# Altium PCB AfternoonCape_RevA3_6chan.PcbDoc
Units mil, origin at the board's own origin, x right, y up, seen from the top; angles counter-clockwise.
Board outline 3400 x 2150.01 mil, 2 copper layers (Top Layer, Bottom Layer); 80 components, 65 nets, 431 pads, 47 vias.
Unrouted connection lines stored in the file: 2.
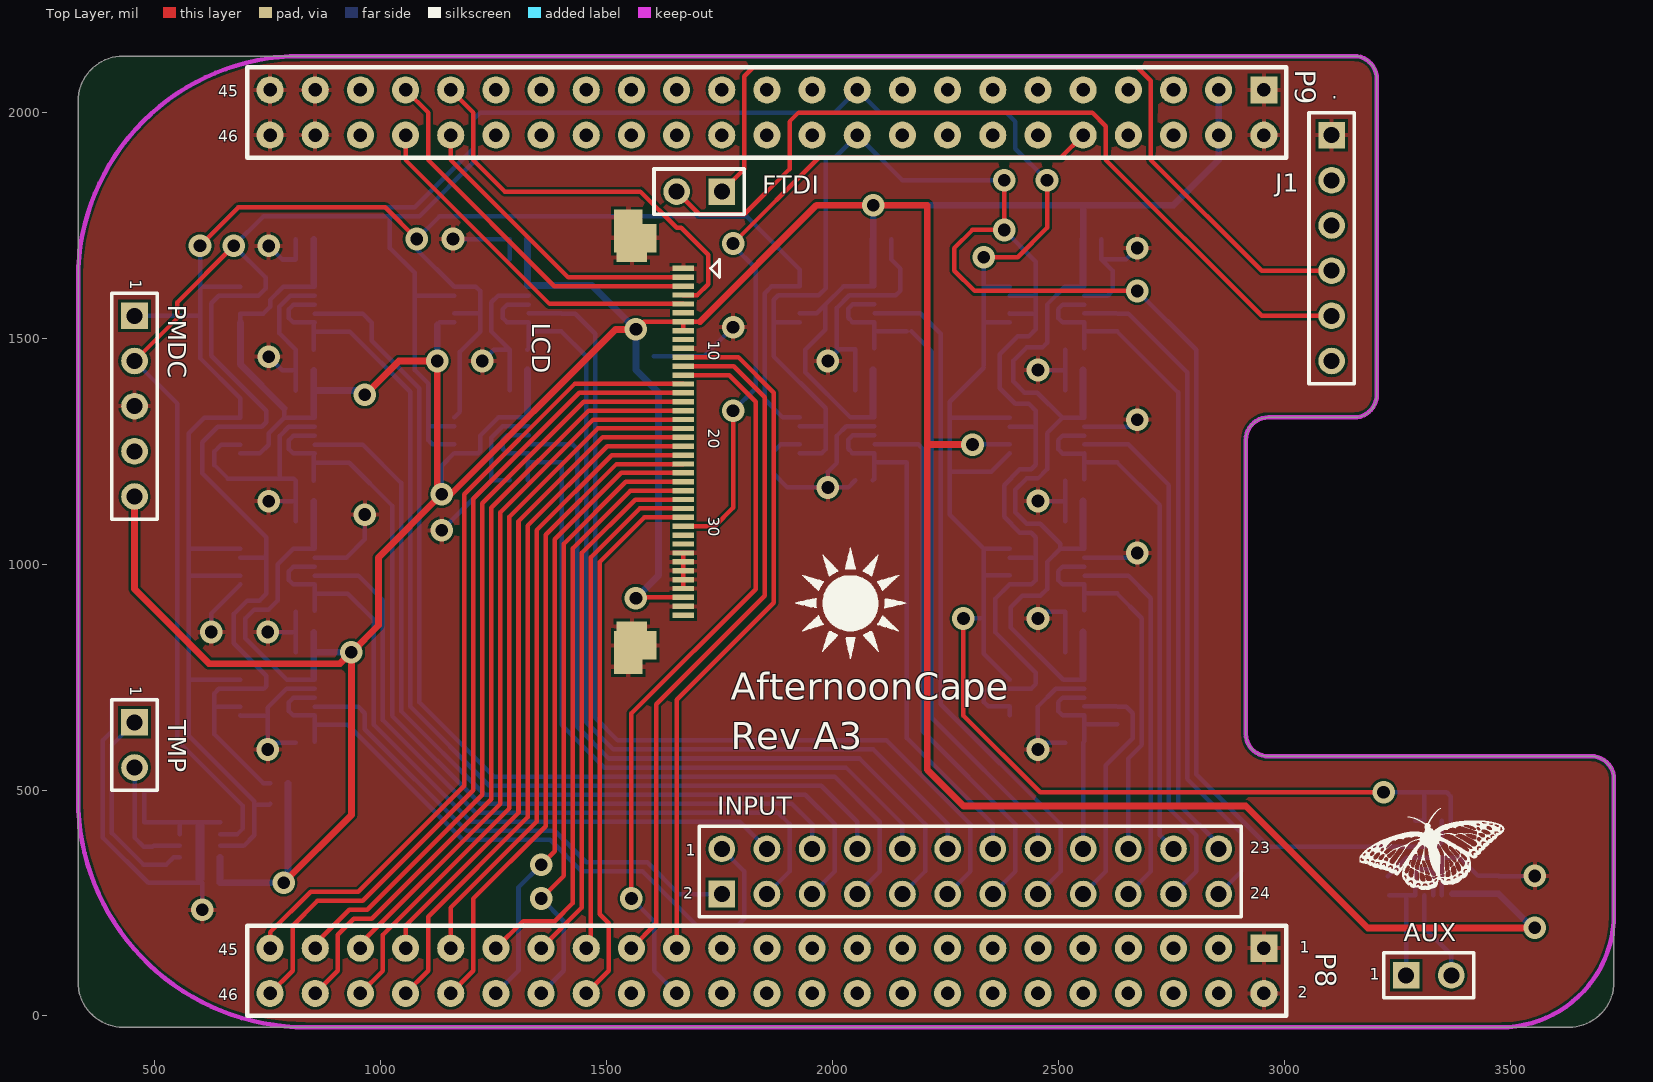
[diagram p0: Top Layer view]
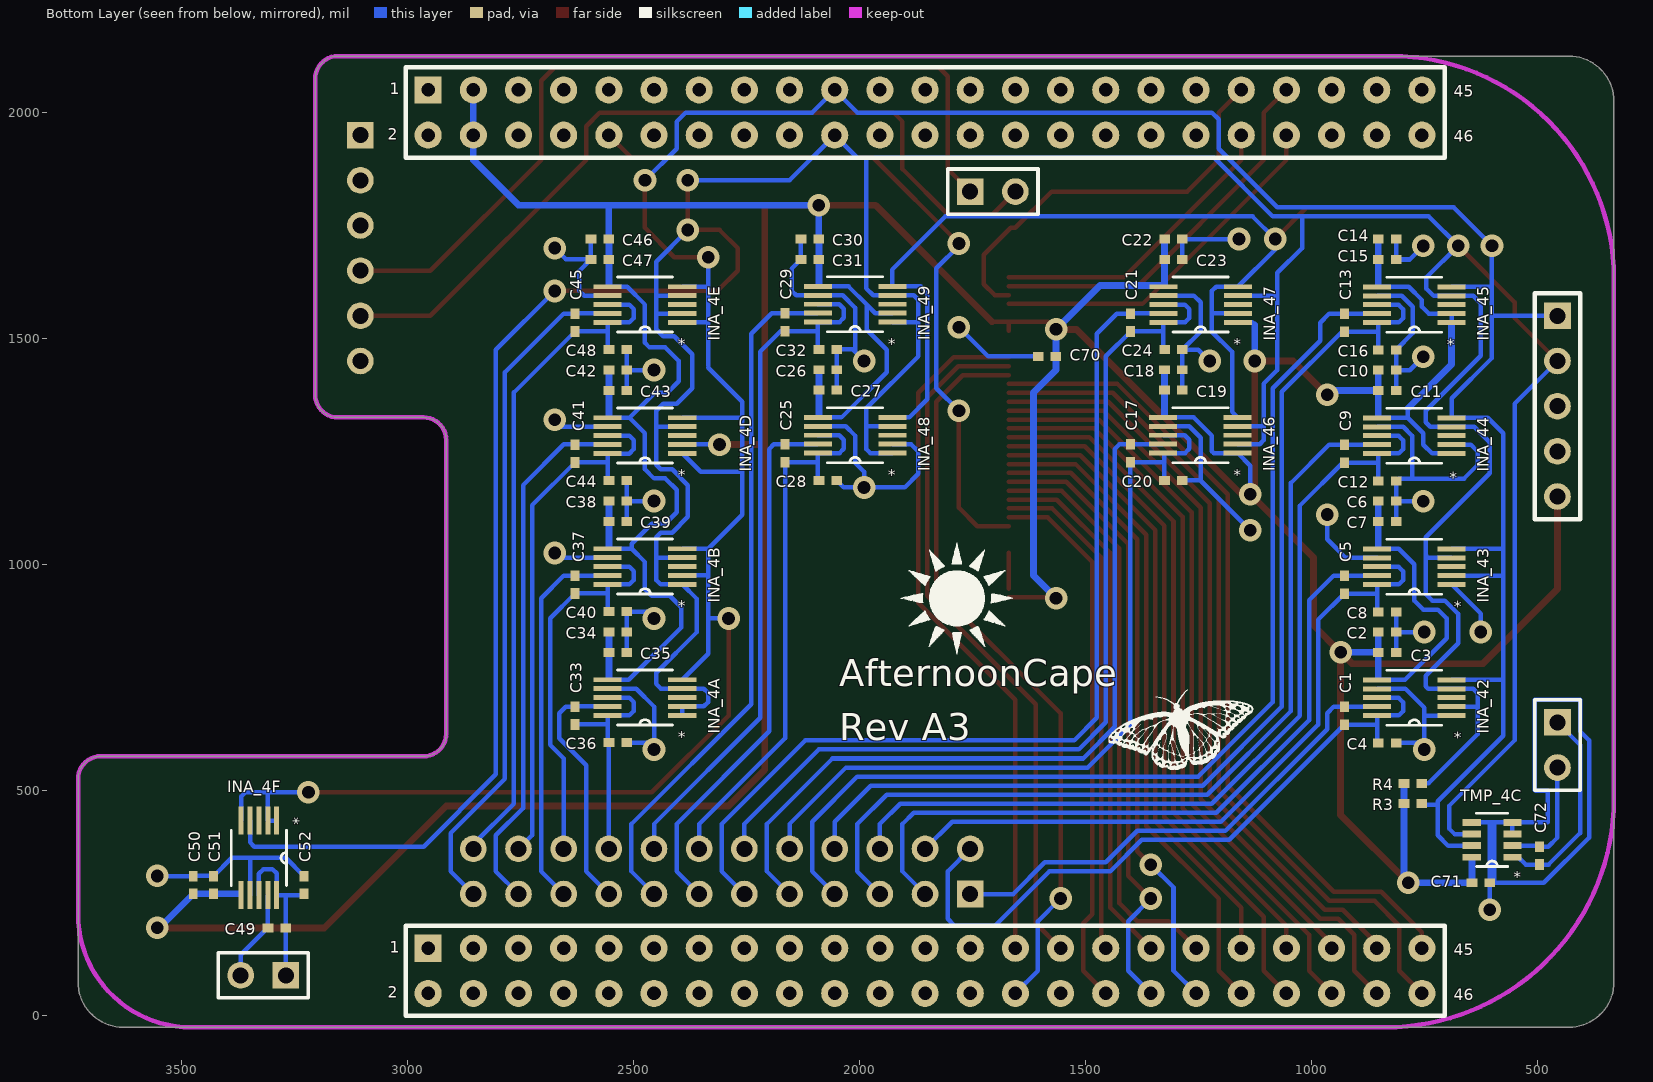
[diagram p1: Bottom Layer view, seen from below]

## Layer stack, top to bottom
Top Layer: signal copper 1.4
Dielectric: dielectric 12.6, FR-4, Dk 4.8
Bottom Layer: signal copper 1.4

## Board outline
3155,2125 3154.99,2125.01 822.5,2125.01 430,2125.01 ccw(c430,2025.01) 330,2025.01 330,480 330,75 ccw(c430,75) 430,-25 845,-25 3450,-25 3630,-25 ccw(c3630,75) 3730,75 3730,285 3730,525 ccw(c3680,525) 3680,575 2980,575 2965,575 cw(c2965,625) 2915,625 2915,1275 cw(c2965,1275) 2965,1325 2980,1325 3155,1325 ccw(c3155,1375) 3205,1375 3205,2075 ccw(c3155,2075) 3155,2125 3150,2125

## Design rules (kind name [scope] priority, off if disabled: settings)
Clearance [All] p1: gap=6
MinimumSolderMaskSliver [All] p1: minsoldermaskwidth=0
PolygonConnect [All] p1: connectstyle=Relief reliefconductorwidth=10 reliefentries=4 polygonreliefangle="90 Angle"
RoomDefinition AfternoonCape_RevA3_6chan [InComponentClass('AfternoonCape_RevA3_6chan')] p1: confinementstyle=ConfineIn formatcopy=TRUE lockcomponents=FALSE outline -715,-495 13870,-495 13870,2530 -715,2530
RoutingVias [All] p1: holewidth=28 width=50 viastyle="Through Hole" minholewidth=28 minwidth=50 maxholewidth=28 maxwidth=50
SilkToSilkClearance [All] p1: silktosilkclearance=5
SilkscreenOverComponentPads [All] p1: minsilkscreentomaskgap=10
SolderMaskExpansion [All] p1: expansion=4
Width [All] p1: maxlimit=20 minlimit=10 preferedwidth=10
25 further rules are at their usual default settings.

## Classes and differential pairs
component class AfternoonCape_RevA3_6chan: AUX C1 C2 C3 C4 C5 C6 C7 C8 C9 C10 C11 C12 C13 C14 C15 C16 C17 C18 C19 C20 C21 C22 C23 C24 C25 C26 C27 C28 C29 C30 C31 C32 C33 C34 C35 C36 C37 C38 C39 C40 C41 C42 C43 C44 C45 C46 C47 C48 C52 C70 C71 C72 FTDI INA_4A INA_4B INA_4D INA_4E INA_4F INA_42 INA_43 INA_44 INA_45 INA_46 INA_47 INA_48 INA_49 INPUT J1 LCD P8 P9 PMDC TMP TMP_4C

## Components (designator, comment, footprint, x,y, rotation, side; value= is the part's Value field where it differs from the comment)
AUX "Header 2" HDR1X2 3270,90 r0 top
C1 "Cap Semi" 0402 926.87,664.68 r270 bottom
C2 "Cap Semi" 0402 831.87,849.68 r0 bottom
C3 "Cap Semi" 0402 831.87,804.68 r0 bottom
C4 "Cap Semi" 0402 831.87,604.68 r0 bottom
C5 "Cap Semi" 0402 926.87,954.68 r270 bottom
C6 "Cap Semi" 0402 831.87,1139.68 r0 bottom
C7 "Cap Semi" 0402 831.87,1094.68 r0 bottom
C8 "Cap Semi" 0402 831.87,894.68 r0 bottom
C9 "Cap Semi" 0402 926.87,1244.68 r270 bottom
C10 "Cap Semi" 0402 831.87,1429.68 r0 bottom
C11 "Cap Semi" 0402 831.87,1384.68 r0 bottom
C12 "Cap Semi" 0402 831.87,1184.68 r0 bottom
C13 "Cap Semi" 0402 926.87,1534.68 r270 bottom
C14 "Cap Semi" 0402 831.87,1719.68 r0 bottom
C15 "Cap Semi" 0402 831.87,1674.68 r0 bottom
C16 "Cap Semi" 0402 831.87,1474.68 r0 bottom
C17 "Cap Semi" 0402 1400.31,1245.63 r270 bottom
C18 "Cap Semi" 0402 1305.31,1430.63 r0 bottom
C19 "Cap Semi" 0402 1305.31,1385.63 r0 bottom
C20 "Cap Semi" 0402 1305.31,1185.63 r0 bottom
C21 "Cap Semi" 0402 1400,1535 r270 bottom
C22 "Cap Semi" 0402 1305,1720 r0 bottom
C23 "Cap Semi" 0402 1305,1675 r0 bottom
C24 "Cap Semi" 0402 1305,1475 r0 bottom
C25 "Cap Semi" 0402 2165,1245.63 r270 bottom
C26 "Cap Semi" 0402 2070,1430.63 r0 bottom
C27 "Cap Semi" 0402 2070,1385.63 r0 bottom
C28 "Cap Semi" 0402 2070,1185.63 r0 bottom
C29 "Cap Semi" 0402 2165,1535.63 r270 bottom
C30 "Cap Semi" 0402 2110,1720 r180 bottom
C31 "Cap Semi" 0402 2110,1675 r180 bottom
C32 "Cap Semi" 0402 2070,1475.63 r0 bottom
C33 "Cap Semi" 0402 2630,665 r270 bottom
C34 "Cap Semi" 0402 2535,850 r0 bottom
C35 "Cap Semi" 0402 2535,805 r0 bottom
C36 "Cap Semi" 0402 2535,605 r0 bottom
C37 "Cap Semi" 0402 2630,955 r270 bottom
C38 "Cap Semi" 0402 2535,1140 r0 bottom
C39 "Cap Semi" 0402 2535,1095 r0 bottom
C40 "Cap Semi" 0402 2535,895 r0 bottom
C41 "Cap Semi" 0402 2630,1245 r270 bottom
C42 "Cap Semi" 0402 2535,1430 r0 bottom
C43 "Cap Semi" 0402 2535,1385 r0 bottom
C44 "Cap Semi" 0402 2535,1185 r0 bottom
C45 "Cap Semi" 0402 2630,1535 r270 bottom
C46 "Cap Semi" 0402 2575,1720 r180 bottom
C47 "Cap Semi" 0402 2575,1675 r180 bottom
C48 "Cap Semi" 0402 2535,1475 r0 bottom
C49 "Cap Semi" 0402 3290,195 r180 bottom
C50 "Cap Semi" 0402 3475,290 r270 bottom
C51 "Cap Semi" 0402 3430,290 r270 bottom
C52 "Cap Semi" 0402 3229.69,290 r270 bottom
C70 "Cap Semi" 0402 1585,1460 r180 bottom
C71 "Cap Semi" 0402 624.68,295 r0 bottom
C72 "Cap Semi" 0402 494.68,355 r270 bottom
FTDI "Header 2" HDR1X2 1755,1825 r180 top
INA_4A "INA226" DGS10 2475,705 r0 bottom
INA_4B "INA226" DGS10 2475,995 r0 bottom
INA_4D "INA226" DGS10 2475,1285 r0 bottom
INA_4E "INA226" DGS10 2475,1575 r0 bottom
INA_4F "INA226" DGS10 3329.69,350 r270 bottom
INA_42 "INA226" DGS10 771.87,704.68 r0 bottom
INA_43 "INA226" DGS10 771.87,994.68 r0 bottom
INA_44 "INA226" DGS10 771.87,1284.68 r0 bottom
INA_45 "INA226" DGS10 771.87,1574.68 r0 bottom
INA_46 "INA226" DGS10 1245.31,1285.63 r0 bottom
INA_47 "INA226" DGS10 1245,1575 r0 bottom
INA_48 "INA226" DGS10 2010,1285.63 r0 bottom
INA_49 "INA226" DGS10 2010,1575.63 r0 bottom
INPUT "Header 12X2" HDR2X12 1755,270 r0 top
J1 "Header 6" HDR1X6 3105,1950 r270 top
LCD "NHD-2.4" NHD-2.4 1670,1655 r270 top
P8 "FEMALE HEADER 2x23" HEADER23X2 1855,100 r180 top
P9 "FEMALE HEADER 2x23" HEADER23X2 1855,2000 r180 top
PMDC "Header 5" HDR1X5 455,1550 r270 top
R3 "Res3" 0402 775,470 r0 bottom
R4 "Res3" 0402 775,515 r0 bottom
TMP "Header 2" HDR1X2 455,650 r270 top
TMP_4C "TMP441_DCN_8" DCN8-L 599.68,390 r0 bottom

## Footprints (in the part's own frame and the unit in brackets; to place one, negate y for a bottom-side part, rotate by r counter-clockwise, add the part's x,y. Pads: shape width x height; smd on the part's side, far side on the other; paste and mask are expansions set on the pad)
0402 [mm] "Chip Capacitor, Body 1.0x0.5mm, IPC High Density"
  rect 0.6x0.5 smd: 1(-0.5,0) 2(0.5,0)
  body extent -0.55,-0.3 0.55,0.3, height 1.3
DCN8-L [mil]
  rect 40x15 smd: 1(-45,38.39) 2(-45,12.8) 3(-45,-12.8) 4(-45,-38.39) 5(45,-38.39) 6(45,-12.8) 7(45,12.8) 8(45,38.39)
  silkscreen extent -34,-59 35,59
DGS10 [mil]
  rect 62x11 smd: 1(-82.5,39.37) 2(-82.5,19.68) 3(-82.5,0) 4(-82.5,-19.68) 5(-82.5,-39.37) 6(82.5,-39.37) 7(82.5,-19.68) 8(82.5,0) 9(82.5,19.68) 10(82.5,39.37)
  silkscreen extent -61,-61 61,61, body extent -96,-59 97,59, height 37
HDR1X2 [mm] "Connector; Header; 2 Position"
  rect 1.5x1.5 hole 0.9: 1(0,0)
  round 1.5 hole 0.9: 2(2.54,0)
  silkscreen extent -1.27,-1.27 3.81,1.27
HDR1X5 [mm] "Connector; Header; 5 Position"
  rect 1.5x1.5 hole 0.9: 1(0,0)
  round 1.5 hole 0.9: 2(2.54,0) 3(5.08,0) 4(7.62,0) 5(10.16,0)
  silkscreen extent -1.27,-1.27 11.43,1.27
HDR1X6 [mm] "Connector; Header; 6 Position"
  rect 1.5x1.5 hole 0.9: 1(0,0)
  round 1.5 hole 0.9: 2(2.54,0) 3(5.08,0) 4(7.62,0) 5(10.16,0) 6(12.7,0)
  silkscreen extent -1.27,-1.27 13.97,1.27
HDR2X12 [mm] "Connector; Header; 12x2 Position"
  rect 1.5x1.5 hole 0.9: 1(0,0)
  round 1.5 hole 0.9: 2(0,2.54) 3(2.54,0) 4(2.54,2.54) 5(5.08,0) 6(5.08,2.54) 7(7.62,0) 8(7.62,2.54) 9(10.16,0) 10(10.16,2.54) 11(12.7,0) 12(12.7,2.54) 13(15.24,0) 14(15.24,2.54) 15(17.78,0) 16(17.78,2.54) 17(20.32,0) 18(20.32,2.54) 19(22.86,0) 20(22.86,2.54) 21(25.4,0) 22(25.4,2.54) 23(27.94,0) 24(27.94,2.54)
  silkscreen extent -1.27,-1.27 29.21,3.81
HEADER23X2 [mil] "HEADER23X2"
  rect 60x60 hole 30 mask+2: 1(-1100,-50)
  round 60 hole 30 mask+2: 2(-1100,50) 3(-1000,-50) 4(-1000,50) 5(-900,-50) 6(-900,50) 7(-800,-50) 8(-800,50) 9(-700,-50) 10(-700,50) 11(-600,-50) 12(-600,50) 13(-500,-50) 14(-500,50) 15(-400,-50) 16(-400,50) 17(-300,-50) 18(-300,50) 19(-200,-50) 20(-200,50) 21(-100,-50) 22(-100,50) 23(0,-50) 24(0,50) 25(100,-50) 26(100,50) 27(200,-50) 28(200,50) 29(300,-50) 30(300,50) 31(400,-50) 32(400,50) 33(500,-50) 34(500,50) 35(600,-50) 36(600,50) 37(700,-50) 38(700,50) 39(800,-50) 40(800,50) 41(900,-50) 42(900,50) 43(1000,-50) 44(1000,50) 45(1100,-50) 46(1100,50)
  silkscreen extent -1150,-100 1150,100
NHD-2.4 [mm]
  rect 0.3x1.2 smd: 1(0,0) 2(0.5,0) 3(1,0) 4(1.5,0) 5(2,0) 6(2.5,0) 7(3,0) 8(3.5,0) 9(4,0) 10(4.5,0) 11(5,0) 12(5.5,0) 13(6,0) 14(6.5,0) 15(7,0) 16(7.5,0) 17(8,0) 18(8.5,0) 19(9,0) 20(9.5,0) 21(10,0) 22(10.5,0) 23(11,0) 24(11.5,0) 25(12,0) 26(12.5,0) 27(13,0) 28(13.5,0) 29(14,0) 30(14.5,0) 31(15,0) 32(15.5,0) 33(16,0) 34(16.5,0) 35(17,0) 36(17.5,0) 37(18,0) 38(18.5,0) 39(19,0) 40(19.5,0)
  rect 0.8x1.6 smd: ""(-2.9,-3.1) ""(22.4,-3.1)
  rect 1.6x2.4 smd: ""(-1.7,-2.7) ""(21.2,-2.7)
  rect 0.55x1.7 smd: ""(-0.625,-2.9) ""(20.125,-2.9)
  silkscreen extent -0.51,1.52 0.51,2.03, body extent -11.68,-29.08 31.24,31.37, height 6.1

## Part data
AUX FTDI TMP: "Header, 2-Pin"
C1 C2 C3 C4 C5 C6 C7 C8 C9 C10 C11 C12 C13 C14 C15 C16 C17 C18 C19 C20 C21 C22 C23 C24 C25 C26 C27 C28 C29 C30 C31 C32 C33 C34 C35 C36 C37 C38 C39 C40 C41 C42 C43 C44 C45 C46 C47 C48 C49 C50 C51 C52 C70 C71 C72: "Capacitor (Semiconductor SIM Model)"
INPUT: "Header, 12-Pin, Dual row"
J1: "6-pin female header, long legs for FTDI-USB cable"
LCD: "2.4\" LCD NHD-2.4-240320SF-CTXL#-FTN1 54132-4062 Molex LCD Connector Footprint"
P8 P9: library part HDR_46_F_2_0.1_0.1, "CONN HEADER FMAL 46PS.1\" DL GOLD"
PMDC: "Header, 5-Pin"
R3 R4: "Resistor"
TMP_4C: "Imported"

## Via types
v1: diameter 50, hole 28, Top Layer to Bottom Layer, 47 vias

## Nets (pads, with @x,y where several pads share a name; then routed paths per layer and width w, separated by ;. In a path a pad name is that pad's centre, name@x,y a point inside that pad or via, vN(x,y) a via of type N, cw(c..) or ccw(c..) an arc to the next point about the centre after c; other vN are vias at no path point)
AIN0: LCD.3 P9.39 | length 856.4
  Top Layer w10: P9.39 1105,2000 1105,1895 1384.37,1615.63 LCD.3
AIN1: LCD.5 P9.40 | length 802
  Top Layer w10: P9.40 1055,1895 1373.74,1576.26 LCD.5
AIN2: LCD.4 P9.37 | length 912.7
  Top Layer w10: P9.37 1205,2000 1205,1895 1275,1825 1575,1825 1655,1745 1665,1745 1725,1685 1725,1620 1700.94,1595.94 LCD.4
AIN3: LCD.2 P9.38 | length 677.6
  Top Layer w10: P9.38 1155,1895 1414.68,1635.32 LCD.2
ALERT: PMDC.4
AUX_N: AUX.2 C49.1 INA_4F.9 | length 202.4
  Bottom Layer w10: INA_4F.9 3310,195.63 3370,135.63 AUX.2
AUX_P: AUX.1 C49.2 C52.2 INA_4F.8 INA_4F.10 | length 378
  Bottom Layer w10: C52.2@3232.5,267.5 INA_4F.10 3290.31,315.63 3299.69,325 3319.69,325 3329.69,315 INA_4F.8 ; AUX.1 3270,195 3270,267.19
B_UART0_RX: FTDI.1 J1.4 | length 1872.9
  Top Layer w10: FTDI.1 1805,1875 1805,2080 1825,2100 2675,2100 2705,2070 2705,1895 2950,1650 J1.4
B_UART0_TX: FTDI.2 J1.5 | length 1855.7
  Top Layer w10: FTDI.2 1705,1775 1805,1775 1905,1875 1905,1980 1925,2000 2575,2000 2605,1970 2605,1895 2950,1550 J1.5
CH0_N: C1.1 INA_42.9 INPUT.1 | length 1093
  Bottom Layer w10: INA_42.9 926.24,685 C1.1 950.63,684.37 965,670 965,635 1190,410 1385,410 1455,340 1590,340 1660,270 INPUT.1
CH0_P: C1.2 C4.2 INA_42.8 INA_42.10 INPUT.2 | length 1517.4
  Bottom Layer w10: C4.2@854.37,607.5 INA_42.10 806.24,665.31 796.87,674.68 796.87,694.68 806.87,704.68 INA_42.8 ; 854.68,645 C1.2 1181.87,390 1375,390 1445,320 1580,320 1700,200 1790,200 1805,215 1805,320 INPUT.2
CH1_N: C5.1 INA_43.9 INPUT.3 | length 1608.5
  Bottom Layer w10: INA_43.9 C5.1@926.24,975 ; C5.1 950.63,974.37 1005,920 1005,655 1210,450 1880,450 1905,425 1905,320 INPUT.3
CH1_P: C5.2 C8.2 INA_43.8 INA_43.10 INPUT.4 | length 1571
  Bottom Layer w10: C8.2@854.37,897.5 INA_43.10 806.24,955.31 796.87,964.68 796.87,984.68 806.87,994.68 INA_43.8 ; 854.68,935 C5.2 985,876.87 985,645 1200,430 1795,430 INPUT.4
CH2_N: C9.1 INA_44.9 INPUT.5 | length 1969.2
  Bottom Layer w10: INA_44.9 C9.1@926.24,1265 ; C9.1 960.63,1264.37 1045,1180 1045,675 1230,490 1940,490 2005,425 2005,320 INPUT.5
CH2_P: C9.2 C12.2 INA_44.8 INA_44.10 INPUT.6 | length 1981.4
  Bottom Layer w10: C12.2 851.56,1242.5 852.18,1243.13 852.18,1225 C9.2 930,1225 1025,1130 1025,665 1220,470 1910,470 1955,425 INPUT.6 ; INA_44.10 806.24,1245.32 796.87,1254.68 796.87,1274.68 806.87,1284.68 INA_44.8
CH3_N: C13.1 INA_45.9 INPUT.7 | length 2327
  Bottom Layer w10: INA_45.9 C13.1@926.24,1555 ; C13.1 960.63,1554.37 980,1535 980,1495 1085,1390 1085,695 1250,530 2005,530 2105,430 2105,320 INPUT.7
CH3_P: C13.2 C16.2 INA_45.8 INA_45.10 INPUT.8 | length 2321.6
  Bottom Layer w10: C16.2 INA_45.10@851.56,1532.5 ; 851.87,1515 C13.2 931.87,1515 1065,1381.87 1065,685 1240,510 1975,510 2055,430 INPUT.8 ; INA_45.10 806.24,1535.31 796.87,1544.68 796.87,1564.68 806.87,1574.68 INA_45.8
CH4_N: C17.1 INA_46.9 INPUT.9 | length 1760.6
  Bottom Layer w10: INA_46.9@1328.44,1265.32 C17.1 1424.68,1265.32 1435,1255 1435,640 1505,570 2060,570 2205,425 2205,320 INPUT.9
CH4_P: C17.2 C20.2 INA_46.8 INA_46.10 INPUT.10 | length 1758.4
  Bottom Layer w10: C20.2 INA_46.10@1325,1243.45 ; 1325.32,1225.95 C17.2 1400.31,644.69 1495,550 2030,550 2155,425 INPUT.10 ; INA_46.10 1279.37,1246.26 1270,1255.63 1270,1275.63 1280,1285.63 INA_46.8
CH5_N: C21.1 INA_47.9 INPUT.11 | length 2118.4
  Bottom Layer w10: INA_47.9 C21.1@1399.37,1555.32 ; C21.1 1430.32,1554.68 1475,1510 1475,660 1525,610 2120,610 2305,425 2305,320 INPUT.11
CH5_P: C21.2 C24.2 INA_47.8 INA_47.10 INPUT.12 | length 2113.3
  Bottom Layer w10: C24.2 1327.5,1477.81 INA_47.10 1279.37,1535.63 1270,1545 1270,1565 1280,1575 INA_47.8 ; 1327.81,1515.31 C21.2 1455,1460.31 1455,650 1515,590 2090,590 2255,425 INPUT.12
CH6_N: C25.1 INA_48.9 INPUT.13 | length 1201.8
  Bottom Layer w10: INA_48.9@2093.13,1265.32 C25.1 2189.68,1265.32 2200,1255 2200,630 2405,425 2405,320 INPUT.13
CH6_P: C25.2 C28.2 INA_48.8 INA_48.10 INPUT.14 | length 1211
  Bottom Layer w10: C28.2 2092.5,1188.44 INA_48.10 2044.37,1246.26 2035,1255.63 2035,1275.63 2045,1285.63 INA_48.8 ; 2093.44,1225.94 C25.2 2165,615 2355,425 INPUT.14
CH7_N: C29.1 INA_49.9 INPUT.15 | length 1536.1
  Bottom Layer w10: INA_49.9@2093.13,1555.32 C29.1 2194.68,1555.32 2240,1510 2240,690 2505,425 2505,320 INPUT.15
CH7_P: C29.2 C32.2 INA_49.8 INA_49.10 INPUT.16 | length 1534.9
  Bottom Layer w10: C32.2@2092.5,1478.44 INA_49.10 2044.37,1536.26 2035,1545.63 2035,1565.63 2045,1575.63 INA_49.8 ; 2092.81,1515.94 C29.2 ; 2175,1515.94 2220,1470.94 2220,660 2455,425 INPUT.16
CH8_N: C33.1 INA_4A.9 INPUT.17 | length 558.5
  Bottom Layer w10: INPUT.17 2605,320 2605,555 2665,615 2665,670 2650.32,684.68 C33.1 ; INA_4A.9 C33.1@2629.37,685.32
CH8_P: C33.2 C36.2 INA_4A.8 INA_4A.10 INPUT.18 | length 508.2
  Bottom Layer w10: C36.2 2555,604.68 INPUT.18 ; C36.2@2557.5,607.81 INA_4A.10 2509.37,665.63 2500,675 2500,695 2510,705 INA_4A.8 ; 2557.81,645.31 C33.2
CH9_N: C37.1 INA_4B.9 INPUT.19 | length 843.2
  Bottom Layer w10: INA_4B.9@2558.13,974.68 C37.1 2655.32,974.68 2705,925 2705,320 INPUT.19
CH9_P: C37.2 C40.2 INA_4B.8 INA_4B.10 INPUT.20 | length 873.5
  Bottom Layer w10: C40.2@2557.5,897.81 INA_4B.10 2509.37,955.63 2500,965 2500,985 2510,995 INA_4B.8 ; 2557.81,935.31 C37.2 2685,880.31 2685,600 2655,570 INPUT.20
CH10_N: C41.1 INA_4D.9 INPUT.21 | length 1175.5
  Bottom Layer w10: INA_4D.9 2654.68,1265.32 2745,1175 2745,460 2805,400 2805,320 INPUT.21
CH10_P: C41.2 C44.2 INA_4D.8 INA_4D.10 INPUT.22 | length 1180.6
  Bottom Layer w10: C44.2@2557.5,1187.81 INA_4D.10 2556.87,1245 2510,1245 2500,1255 2500,1275 2510,1285 INA_4D.8 ; 2557.81,1225.31 C41.2 2725,1130.31 2725,400 INPUT.22
CH11_N: C45.1 INA_4E.9 INPUT.23 | length 1506
  Bottom Layer w10: INA_4E.9 C45.1@2629.37,1555.32 ; C45.1 2655.32,1554.68 2785,1425 2785,525 2905,405 2905,320 INPUT.23
CH11_P: C45.2 C48.2 INA_4E.8 INA_4E.10 INPUT.24 | length 1511.5
  Bottom Layer w10: C48.2@2557.5,1477.81 INA_4E.10 2509.37,1535.63 2500,1545 2500,1565 2510,1575 INA_4E.8 ; 2557.81,1515.31 C45.2 2765,1380.31 2765,470 2855,380 INPUT.24
GND: C2.1 C3.1 C4.1 C6.1 C7.1 C8.1 C10.1 C11.1 C12.1 C14.1 C15.1 C16.1 C18.1 C19.1 C20.1 C22.1 C23.1 C24.1 C26.1 C27.1 C28.1 C30.1 C31.1 C32.1 C34.1 C35.1 C36.1 C38.1 C39.1 C40.1 C42.1 C43.1 C44.1 C46.1 C47.1 C48.1 C50.1 C51.1 C52.1 C70.1 C71.1 INA_4A.7 INA_4B.7 INA_4D.7 INA_4E.7 INA_4F.7 INA_42.1 INA_42.7 INA_43.1 INA_43.7 INA_44.2 INA_44.7 INA_45.7 INA_46.7 INA_47.7 INA_48.2 INA_48.7 INA_49.7 J1.1 LCD. LCD.1 LCD.10 LCD.33 LCD.34 LCD.35 LCD.36 LCD.37 LCD.39 P8.1 P8.2 P9.1 P9.2 P9.43 P9.44 P9.45 P9.46 PMDC.3 TMP_4C.3 TMP_4C.4 TMP_4C.5 | length 7116.8
  Top Layer w10: LCD.37 LCD.36 LCD.35 LCD.34 LCD.33
  Bottom Layer w10: TMP_4C.3 TMP_4C.4 ; v1(605,235) C71.1 485,295 385,395 385,610 405,630 405,700 505,700 505,500 503.39,498.39 476.61,498.39 476.61,428.39 TMP_4C.4 ; v1(625,850) 625,890.94 INA_43.1 ; TMP_4C.5 TMP_4C.4 ; INA_42.1 690,664.68 750,664.68 ; INA_44.2 647.19,1265 631.87,1249.68 631.87,1219.68 661.87,1189.68 776.87,1189.68 ; v1(750,850) 750.32,849.68 C2.1 ; v1(751.87,1139.68) C6.1 ; v1(751.87,1459.68) 781.87,1429.68 C10.1 ; v1(751.87,1704.68) 781.87,1674.68 C15.1 C14.1 ; C4.1 764.68,604.68 v1(750,590) 750,664.68 ; C3.1 C8.1 ; C7.1 C12.1 807.19,1189.68 776.87,1189.68 ; C11.1 C10.1 ; INA_42.7 791.56,724.37 750,682.81 750,664.68 ; INA_43.7 924.37,1014.37 965,1055 v1(965,1110) ; INA_44.7 796.56,1304.37 776.87,1284.68 776.87,1189.68 ; INA_45.7 799.37,1594.37 775,1570 775,1511.87 C16.1 C10.1 ; v1(1135,1075) 1245,1185 ; v1(1160,1720) C22.1 C23.1 ; v1@1225,1430 v1@1225.63,1430.63 ; v1(1225,1450) 1250,1475 C24.1 ; C20.1 1245,1185.63 1245,1280 1270.32,1305.32 INA_46.7 ; C19.1 C18.1 C24.1 ; INA_47.7 1259.68,1594.68 1245,1580 1245,1515.31 C24.1 ; C70.1 1715,1460 v1(1780,1525) ; INA_48.2 1885.95,1265.95 1870,1250 1870,1200 1900,1170 v1(1990,1170) ; v1(1990,1450) 2010,1470 ; C28.1 2034.69,1170 v1(1990,1170) ; C27.1 C26.1 C32.1 2015.63,1475.63 2010,1470 ; INA_48.7 2030.32,1305.32 2010,1285 2010,1225 1990,1205 v1(1990,1170) ; C30.1 C31.1 2150,1654.69 2150,1605 2140.32,1595.32 INA_49.7 2037.31,1595.32 2010,1568 2010,1470 ; v1(2455,880) 2470,895 C40.1 C34.1 C35.1 ; v1(2455,1140) C38.1 ; v1(2455,1430) C42.1 ; C36.1 2470,605 v1(2455,590) 2455,685 2494.68,724.68 INA_4A.7 ; C39.1 C38.1 ; C44.1 C38.1 ; C43.1 C42.1 ; C48.1 C42.1 ; INA_4B.7 2664.68,1014.68 v1(2675,1025) ; INA_4D.7 2659.68,1304.68 v1(2675,1320) ; INA_4E.7 2609.68,1594.68 2620,1605 2620,1649.69 C47.1 ; C46.1 C47.1 ; v1(2675,1700) 2650,1675 C47.1 ; C52.1 3270,350 3349.69,350 ; INA_4F.7 3349.37,349.68 3349.69,350 ; C50.1@3474.69,310 3429.69,310 3389.69,350 3349.69,350 ; C50.1 3554.69,309.68 v1(3555,310)
I2C1_SCL: P9.17
I2C1_SDA: P9.18
I2C2_SCL: INA_4A.5 INA_4B.2 INA_4B.5 INA_4D.1 INA_4D.5 INA_4E.1 INA_4E.5 INA_4F.1 INA_4F.2 INA_4F.5 INA_42.5 INA_43.2 INA_43.5 INA_44.5 INA_45.5 INA_46.5 INA_47.2 INA_47.5 INA_48.5 INA_49.5 P9.19 PMDC.1 R3.1 TMP_4C.7 | length 10182.6
  Top Layer w10: v1(600,1705) 685,1790 1010,1790 v1(1080,1720) ; v1(2290,880) 2290,665 2460,495 v1(3220,495) ; v1(2335,1680) 2410,1680 2475,1745 v1(2475,1850)
  Bottom Layer w10: PMDC.1 600,1550 ; 579.06,1034.06 INA_43.5 ; 605.94,1614.06 INA_45.5 ; TMP_4C.7 697.2,377.2 720,400 720,460 720,467.5 ; INA_42.5 575,744.06 ; INA_43.2 575,975 ; R3.1 752.82,467.5 720,467.5 ; INA_47.2 1219.68,1555.32 1220,1555 ; INA_46.5 1175,1337.19 1175,1470 1220,1515 1220,1555 ; INA_48.5 1890,1325 1850,1365 1850,1600 1865,1615 INA_49.5 1927.5,1652.5 1810,1770 1130,1770 v1(1080,1720) 1080,1696.87 INA_47.5 1210.63,1614.37 1220,1605 1220,1555 ; v1(2290,880) 2335,880 ; 2335,1435 2260,1360 2260,1325 ; 2335,1440 2335,1535 ; v1(2335,1680) 2335,1614.37 ; INA_4A.5 2335,801.87 2335,880 ; INA_4B.2 2335,975.32 ; INA_4B.5 2335,1034.37 ; INA_4D.1 2351.87,1205 2260,1205 ; INA_4D.5 2260.63,1324.37 2260,1325 ; INA_4E.1 2335.63,1535.63 2335,1535 ; INA_4E.5 2335,1614.37 ; v1(2475,1850) 2405,1920 2405,1980 2385,2000 2105,2000 P9.19 2005,2000 1220,2000 1205,1985 1205,1920 1075,1790 685,1790 v1(600,1705) 600,1550 ; v1(3220,495) 3310,495 ; INA_4F.1 INA_4F.2 3310,495 ; INA_4F.5 3369.06,485.94 3360,495 3310,495 ; 575,744.06 575,975 ; 575,744.06 575,620 720,475 720,467.5 ; 575,975 575,1290 609.06,1324.06 INA_44.5 689.37,1367.18 600,1456.56 600,1550 ; 2260,1205 2260,1325 ; 2260,1205 2260,1109.37 2335,1034.37 ; 2335,880 2335,975.32 ; 2335,975.32 2335,1034.37 ; 2335,1535 2335,1614.37
I2C2_SDA: INA_4A.1 INA_4A.2 INA_4A.4 INA_4B.1 INA_4B.4 INA_4D.4 INA_4E.2 INA_4E.4 INA_4F.4 INA_42.2 INA_42.4 INA_43.4 INA_44.4 INA_45.4 INA_46.2 INA_46.4 INA_47.4 INA_48.1 INA_48.4 INA_49.1 INA_49.4 P9.20 PMDC.2 R4.1 TMP_4C.6 | length 11269.5
  Top Layer w10: PMDC.2 550,1545 550,1580 v1(675,1705) ; v1(2380,1850) v1(2380,1740) 2310,1740 2270,1700 2270,1650 2315,1605 v1(2675,1605)
  Bottom Layer w10: PMDC.2 550,1355 550,610 695,465 695,415 682.8,402.8 TMP_4C.6 ; INA_42.2 635,685 631.87,688.13 ; INA_43.4 741.56,1014.37 746.87,1019.68 ; R4.1 740.31,515 631.87,623.44 631.87,688.13 ; INA_47.4 1075,1594.68 ; INA_46.2 1114.05,1265.95 1105,1275 1105,1305 ; INA_46.4 1105.32,1305.32 1105,1305 ; INA_48.1 1976.26,1246.26 1985,1255 1985,1305 ; INA_48.4 1984.68,1305.32 1985,1305 ; INA_49.1 1870,1536.26 ; v1(2380,1740) 2450,1670 2450,1594.68 ; v1(2380,1850) 2155,1850 P9.20 2005,1900 1985,1900 ; INA_4A.1 INA_4A.2 2344.68,685.32 2335,695 2335,715 2344.68,724.68 INA_4A.4 2439.68,724.68 2450,735 2450,760 2360,850 2360,923.13 INA_4B.1 2440.63,955.63 2450,965 2450,1015 ; INA_4B.4 2449.68,1014.68 2450,1015 ; INA_4D.4 2449.68,1304.68 2450,1305 ; INA_4E.2 2392.82,1555 2450,1555 ; INA_4E.4 2450,1594.68 ; v1(2675,1605) 2805,1475 2805,535 2965,375 3340,375 3349.37,384.37 INA_4F.4 ; 631.87,688.13 631.87,714.68 641.56,724.37 INA_42.4 741.56,724.37 746.87,729.68 746.87,753.13 675,825 675,890 704.68,919.68 731.87,919.68 746.87,934.68 746.87,1019.68 ; 746.87,1019.68 746.87,1059.68 605,1201.56 605,1270 639.37,1304.37 INA_44.4 736.56,1304.37 746.87,1314.68 746.87,1339.68 625,1461.56 625,1577.81 641.56,1594.37 INA_45.4 729.37,1594.37 745,1610 745,1635 v1(675,1705) 740,1770 1020,1770 ; 1020,1770 1085,1770 1215,1900 1985,1900 ; 1020,1770 1020,1700 1075,1645 1075,1594.68 ; 1075,1594.68 1075,1430 1105,1400 1105,1305 ; 1870,1536.26 1870,1585.63 1879.68,1595.32 INA_49.4 1969.68,1595.32 1985,1610.63 1985,1900 ; 1870,1536.26 1870,1460 1985,1345 1985,1305 ; 2450,1015 2450,1060 2440,1070 2415,1070 2380,1105 2380,1175 2415,1210 2440,1210 2450,1220 2450,1305 ; 2450,1305 2450,1340 2435,1355 2405,1355 2370,1390 2370,1465 2410,1505 2435,1505 2450,1520 2450,1555 ; 2450,1555 2450,1594.68
LCD_DATA0: LCD.14 P8.45 | length 1831.5
  Top Layer w10: P8.45 755,185 845,275 950,275 1185,510 1185,1155 1430,1400 1669.09,1400 LCD.14
LCD_DATA1: LCD.15 P8.46 | length 1902.1
  Top Layer w10: P8.46 805,100 805,200 860,255 960,255 1205,500 1205,1145 1439.41,1379.41 LCD.15
LCD_DATA2: LCD.16 P8.43 | length 1699.8
  Top Layer w10: P8.43 855,160 930,235 970,235 1225,490 1225,1135 1449.72,1359.72 LCD.16
LCD_DATA3: LCD.17 P8.44 | length 1774
  Top Layer w10: P8.44 905,100 905,180 940,215 980,215 1245,480 1245,1125 1460.04,1340.04 LCD.17
LCD_DATA4: LCD.18 P8.41 | length 1583.5
  Top Layer w10: P8.41 955,160 1265,470 1265,1115 1470.35,1320.35 LCD.18
LCD_DATA5: LCD.19 P8.42 | length 1657.7
  Top Layer w10: P8.42 1005,100 1005,180 1285,460 1285,1105 1480.67,1300.67 LCD.19
LCD_DATA6: LCD.20 P8.39 | length 1490.6
  Top Layer w10: P8.39 1055,200 1305,450 1305,1095 1490.98,1280.98 LCD.20
LCD_DATA7: LCD.21 P8.40 | length 1564.9
  Top Layer w10: P8.40 1105,100 1105,220 1325,440 1325,1085 1501.3,1261.3 LCD.21
LCD_DATA8: LCD.22 P8.37 | length 1397.7
  Top Layer w10: P8.37 1155,240 1345,430 1345,1075 1511.61,1241.61 LCD.22
LCD_DATA9: LCD.23 P8.38 | length 1472
  Top Layer w10: P8.38 1205,100 1205,260 1365,420 1365,1065 1521.93,1221.93 LCD.23
LCD_DATA10: LCD.24 P8.36 | length 1404.8
  Top Layer w10: v1(1355,335) 1385,365 1385,1055 1532.24,1202.24 LCD.24
  Bottom Layer w10: P8.36 1305,100 1305,285 v1(1355,335)
LCD_DATA11: LCD.25 P8.34 | length 1404.1
  Top Layer w10: v1(1355,260) 1405,310 1405,1045 1542.56,1182.56 LCD.25
  Bottom Layer w10: P8.34 1405,100 1405,210 v1(1355,260) ; v1@1355,255 v1(1355,260) ; v1@1355,280 v1(1355,260)
LCD_DATA12: LCD.26 P8.35 | length 1294.4
  Top Layer w10: P8.35 1315,210 1385,210 1425,250 1425,1035 1552.87,1162.87 LCD.26
LCD_DATA13: LCD.27 P8.33 | length 1186.2
  Top Layer w10: P8.33 1445,240 1445,1025 1563.19,1143.19 LCD.27
LCD_DATA14: LCD.28 P8.31 | length 1119.1
  Top Layer w10: P8.31 1465,160 1465,1015 1573.5,1123.5 LCD.28
LCD_DATA15: LCD.29 P8.32 | length 1209.9
  Top Layer w10: P8.32 1505,100 1505,205 1485,225 1485,1005 1583.82,1103.82 LCD.29
LCD_HSYNC: LCD.12 P8.29 | length 1550.6
  Top Layer w10: P8.29 1610,205 1610,690 1850,930 1850,1370 1781.54,1438.46 LCD.12
LCD_PCLK: LCD.13 P8.28 | length 1649.7
  Top Layer w10: v1(1555,260) 1555,670 1830,945 1830,1360 1771.22,1418.78 LCD.13
  Bottom Layer w10: v1(1555,260) 1605,210 1605,100 P8.28
LCD_VSYNC: LCD.11 P8.27 | length 1551.4
  Top Layer w10: P8.27 1655,700 1870,915 1870,1380 1791.85,1458.15 LCD.11
MUX_SEL0: P8.12
MUX_SEL1: P9.23
MUX_SEL2: P9.27
MUX_SEL3: P9.12
PADN: C72.1 TMP.2 TMP_4C.2 | length 260.6
  Bottom Layer w10: TMP.2 455,395 475.32,374.68 C72.1 ; C72.1@497.2,377.2 TMP_4C.2
PADP: C72.2 TMP.1 TMP_4C.1 | length 451
  Bottom Layer w10: TMP.1 405,600 405,405 474.69,335.31 C72.2 525.31,335.31 541.61,351.61 TMP_4C.1
SYS_RESETN: LCD.30 P9.10 | length 1627.8
  Top Layer w10: LCD.30 1739.13,1084.13 1780,1125 v1(1780,1340) ; v1(1780,1710) 1970,1900 2505,1900 P9.10
  Bottom Layer w10: v1(1780,1340) 1830,1390 1830,1655 1780,1705 v1(1780,1710)
V3_3D: C2.2 C3.2 C6.2 C7.2 C10.2 C11.2 C14.2 C15.2 C18.2 C19.2 C22.2 C23.2 C26.2 C27.2 C30.2 C31.2 C34.2 C35.2 C38.2 C39.2 C42.2 C43.2 C46.2 C47.2 C50.2 C51.2 C70.2 C71.2 INA_4A.6 INA_4B.6 INA_4D.2 INA_4D.6 INA_4E.6 INA_4F.6 INA_42.6 INA_43.6 INA_44.1 INA_44.6 INA_45.1 INA_45.2 INA_45.6 INA_46.1 INA_46.6 INA_47.1 INA_47.6 INA_48.6 INA_49.2 INA_49.6 LCD.7 LCD.8 LCD.38 P9.3 P9.4 PMDC.5 R3.2 R4.2 TMP_4C.8 | length 14343.7
  Top Layer w10: v1@1125,1165 v1(1135,1155) v1@1155,1155 ; v1(1565,925) 1566.65,926.65 LCD.38 ; v1(1565,1520) 1581.89,1536.89 LCD.7 ; LCD.8 LCD.7 ; 1706.89,1536.89 LCD.7
  Top Layer w15: PMDC.5 455,945 620,780 909.09,780 ; v1(785,295) 935,445 v1(935,805) ; 910,780 v1(935,805) ; v1(965,1375) 1040,1450 v1(1125,1450) v1@1125,1165 ; v1(1135,1155) 995,1015 995,865 v1(935,805) ; v1@1155,1155 1520,1520 v1(1565,1520) ; 1706.89,1536.89 1965,1795 v1(2090,1795) 2210,1795 2210,1265 ; v1(2310,1265) 2210,1265 ; v1(3555,195) 3185,195 2915,465 2290,465 2210,545 2210,1265
  Bottom Layer w10: INA_44.1 732.5,1245.32 751.87,1264.68 751.87,1289.68 786.24,1324.06 ; INA_45.1 INA_45.2 740,1555 755,1570 755,1585 784.06,1614.06 INA_45.6 ; 786.24,1345.31 786.24,1324.06 ; INA_42.6 792.5,744.06 700,836.56 700,880 719.68,899.68 751.87,899.68 771.87,919.68 771.87,999.68 806.24,1034.06 INA_43.6 ; INA_44.6 786.24,1324.06 ; 1125,1530 1130.63,1535.63 INA_47.1 ; v1(1135,1155) 1135,1218.45 INA_46.1 1216.26,1246.26 1220,1250 1220,1285 1260,1325 INA_46.6 ; INA_49.2 1965.32,1555.95 1984.37,1575 ; C30.2@2089.69,1720 C30.2@2089.69,1720.63 ; v1(2090,1795) v1@2090.31,1794.69 ; INA_48.6 2040,1325 1940,1425 1940,1475 1984.37,1519.37 1984.37,1575 ; INA_49.6 2024.37,1615 1984.37,1575 ; v1@2310.32,1265.32 INA_4D.2 ; INA_4A.6 2510.63,744.37 2395,860 2395,905 2420,930 2460,930 2475,945 2475,1005 2504.37,1034.37 ; INA_4B.6 2504.37,1034.37 ; INA_4D.6 2509.37,1324.37 ; INA_4E.6 2514.37,1614.37 2475,1575 2475,1490 2465,1480 2430,1480 2400,1450 2400,1405 2425,1380 2453.74,1380 2509.37,1324.37 ; 2504.37,1034.37 2504.37,1045.63 2460,1090 2430,1090 2405,1115 2405,1165 2430,1190 2455,1190 2475,1210 2475,1290 2509.37,1324.37
  Bottom Layer w15: TMP_4C.8@644.37,351.3 C71.2 v1(785,295) ; INA_45.1 689.37,1442.18 786.24,1345.31 ; v1@784.69,295.31 v1(785,295) ; R4.2 795,514.69 795,305 v1(785,295) ; INA_42.6@851.56,746.87 C2.2 ; INA_43.6@851.56,1036.87 C7.2 C6.2 ; INA_44.6@851.56,1326.87 C11.2 ; C10.2 C11.2 ; INA_45.6@851.56,1616.87 C15.2 C14.2 ; C3.2@851.87,805 v1(935,805) ; v1(965,1375) 955.32,1384.68 C11.2 ; v1(1125,1450) 1125,1530 ; C22.2 C23.2 1324.69,1617.18 1467.82,1617.18 v1(1565,1520) 1565,1430 1615,1380 1615,975 v1(1565,925) ; INA_46.6@1325,1327.82 C19.2 C18.2 ; INA_48.6@2089.69,1327.82 C27.2 C26.2 ; INA_49.6@2089.69,1617.82 C30.2@2089.69,1720 ; v1(2090,1795) 2555,1795 ; C30.2 v1@2090.31,1794.69 ; INA_4A.6@2554.69,747.18 C35.2 C34.2 ; INA_4B.6@2554.69,1037.18 C39.2 C38.2 ; INA_4D.6@2554.69,1327.18 C43.2 C42.2 ; INA_4E.6@2554.69,1617.18 2554.69,1675 C46.2@2554.69,1720 ; C46.2 2555.31,1794.69 2555,1795 ; P9.3 P9.4 2855,1895 2755,1795 2555,1795 ; INA_4F.6@3372.19,270.63 3429.69,270.63 C50.2@3474.69,270.63 ; C50.2 3550.31,195 v1(3555,195)
pads on no net: INA_4A.3 INA_4B.3 INA_4D.3 INA_4E.3 INA_4F.3 INA_42.3 INA_43.3 INA_44.3 INA_45.3 INA_46.3 INA_47.3 INA_48.3 INA_49.3 J1.2 J1.3 J1.6 LCD.6 LCD.9 LCD.31 LCD.32 LCD.40 P8.3 P8.4 P8.5 P8.6 P8.7 P8.8 P8.9 P8.10 P8.11 P8.13 P8.14 P8.15 P8.16 P8.17 P8.18 P8.19 P8.20 P8.21 P8.22 P8.23 P8.24 P8.25 P8.26 P8.30 P9.5 P9.6 P9.7 P9.8 P9.9 P9.11 P9.13 P9.14 P9.15 P9.16 P9.21 P9.22 P9.24 P9.25 P9.26 P9.28 P9.29 P9.30 P9.31 P9.32 P9.33 P9.34 P9.35 P9.36 P9.41 P9.42

## Polygon pours and split planes (outlines as drawn)
GND on Top Layer "Top Overlay-No Net" (solid, pour order 5): 3150,2125 3155,2125 cw(c3155,2075) 3205,2075 3205,1375 cw(c3155,1375) 3155,1325 3145,1325 2975,1325 2965,1325 ccw(c2965,1275) 2915,1275 2915,625 ccw(c2965,625) 2965,575 2970,575 3680,575 cw(c3680,525) 3730,525 3730,520 3730,225 3720,150 3690,85 3635,30 3570,-10 3505,-25 3435,-25 835,-25 730,-15 600,30 480,120 400,220 350,340 330,445 330,600 330,1600 335,1710 360,1805 410,1905 475,1985 570,2055 665,2100 745,2120 822.5,2125.01 3155,2125

## Keep-outs
Keep-Out Layer:
  lines w10: 329.99,1632.5 cw(c822.5,1632.5) 822.5,2125.01 ; 330,1635 330,480 ccw(c835,480) 835,-25 3480,-25 ccw(c3480,225) 3730,225 3730,525 ccw(c3680,525) 3680,575 3620,575 2970,575 2965,575 cw(c2965,625) 2915,625 2915,645 2915,1260 2915,1275 cw(c2965,1275) 2965,1325 2995,1325 3145,1325 3155,1325 ccw(c3155,1375) 3205,1375 3205,1405 3205,1525 3205,2000 3205,2075 ccw(c3155,2075) 3155,2125 3080,2125 825,2125

## Other copper
Bottom Layer:
  rectangle net GND: 590,300 610,428.39

## Silkscreen, mask and mechanical layers (free items; w line width, h text height)
Top Overlay:
  drawing of 16 lines, arcs and shapes, not listed
  text "." at 3105,2030 h30
  text "1" at 445,1630 h25 r270
  text "1" at 445,730 h25 r270
  text "AfternoonCape" at 1775,700 h60
  text "Rev A3" at 1775,590 h60
  text "1" at 3035,140 h25
  text "1" at 3190,80 h25
  text "2" at 3030,40 h25
Bottom Overlay:
  drawing of 14 lines, arcs and shapes, not listed
  text "AfternoonCape" at 2045,730 h60
  text "Rev A3" at 2045,610 h60

## Text inside footprints (layer, text, board x,y; h text height)
INA_4A: Bottom Overlay "*" at 2385,640 h25 r180
INA_4B: Bottom Overlay "*" at 2385,930 h25 r180
INA_4D: Bottom Overlay "*" at 2385,1220 h25 r180
INA_4E: Bottom Overlay "*" at 2385,1510 h25 r180
INA_4F: Bottom Overlay "*" at 3264.69,440 h25 r90
INA_42: Bottom Overlay "*" at 666.87,639.68 h25 r180
INA_43: Bottom Overlay "*" at 666.87,929.68 h25 r180
INA_44: Bottom Overlay "*" at 676.87,1214.68 h25 r180
INA_45: Bottom Overlay "*" at 681.87,1509.68 h25 r180
INA_46: Bottom Overlay "*" at 1155.31,1220.63 h25 r180
INA_47: Bottom Overlay "*" at 1155,1510 h25 r180
INA_48: Bottom Overlay "*" at 1920,1220.63 h25 r180
INA_49: Bottom Overlay "*" at 1920,1510.63 h25 r180
INPUT: Top Overlay "1" at 1675,355 h25; Top Overlay "2" at 1670,260 h25; Top Overlay "23" at 2925,360 h25; Top Overlay "24" at 2925,260 h25
LCD: Top Overlay "10" at 1725,1495 h25 r270; Top Overlay "20" at 1725,1300 h25 r270; Top Overlay "30" at 1725,1105 h25 r270
P8: Top Overlay "45" at 640,135 h25; Top Overlay "46" at 640,35 h25; Bottom Overlay "1" at 3040,140 h25; Bottom Overlay "2" at 3045,40 h25; Bottom Overlay "46" at 685,35 h25; Bottom Overlay "45" at 685,135 h25
P9: Top Overlay "46" at 640,1935 h25; Top Overlay "45" at 640,2035 h25; Bottom Overlay "45" at 685,2035 h25; Bottom Overlay "46" at 685,1935 h25; Bottom Overlay "2" at 3045,1940 h25; Bottom Overlay "1" at 3040,2040 h25
TMP_4C: Bottom Overlay "*" at 534.69,330 h25 r180